# EAGLE board bq25504v2 (EAGLE 7.3.0)
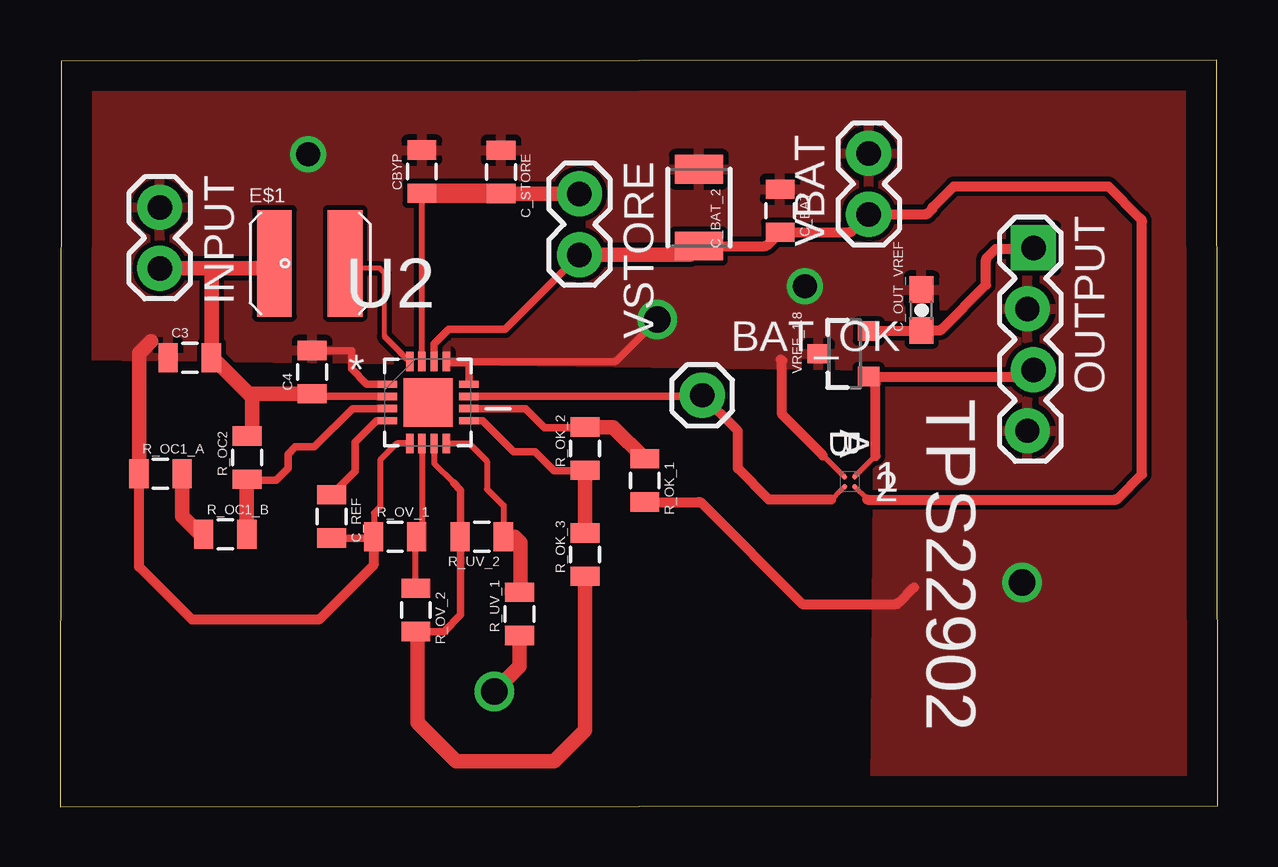
[diagram p0: board, top side]
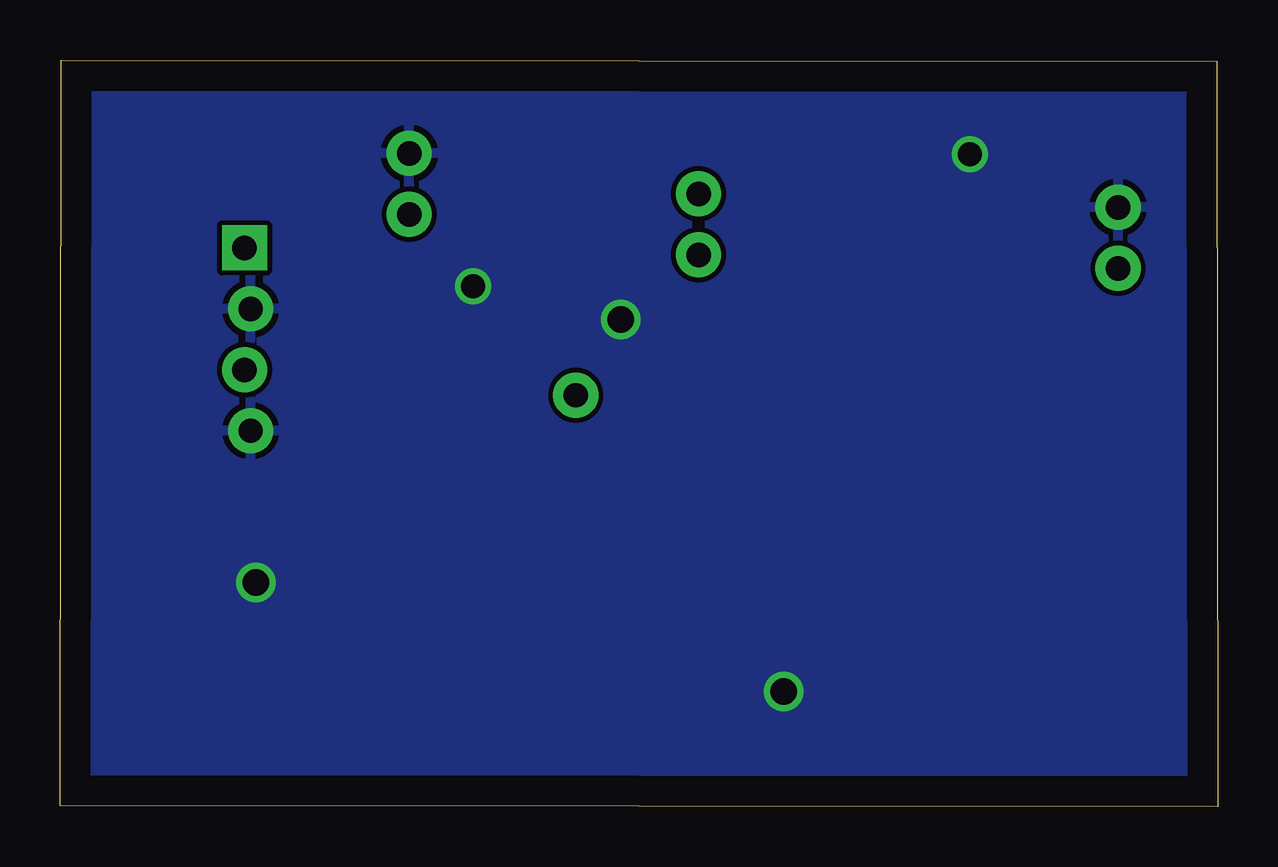
[diagram p1: board, bottom side, seen from below]

Size 48.27 x 31.12 mm. Coordinates in mm from the lower left corner, seen from the top.
Outline: 0,0 48.27,0.05 48.22,31.12 0.05,31.07 0,0
Copper layers (1*16): Top 0.035mm / dielectric 1.5mm / Bottom 0.035mm
Design rules "default *": minimum track width 8mil, minimum drill 24mil, track to track 8mil, track to pad 8mil, pad to pad 8mil, via to via 8mil, smd to smd 8mil, copper to edge 50mil, drill to drill 8mil, minimum pad ring 10mil, minimum via ring 8mil, stop-mask expansion 4mil, vias tented up to drill 0mil, thermal gap 10mil

## Footprints (pad centres in the part's own frame; a part is rotated, then mirrored left to right if it is on the bottom)
1X01 = drill 1.016 pad 1.88: 1 0,0
0805 = smd 0.8 x 1.2: 1 -0.9,0; 2 0.9,0
1210 = smd 1.2 x 2: 1 -1.6,0; 2 1.6,0
0603-CAP = smd 1.1 x 1: 1 -0.85,0; 2 0.85,0
LPS4018 = smd 1.448 x 4.445: A -1.482,0; B 1.469,0
1X02 = drill 1.016 pad 1.88: 1 0,0; 2 2.54,0
1X04_LOCK = drill 1.016 pad 1.88 square: 1 0,0.127 | drill 1.016 pad 1.88: 2 2.54,-0.127; 3 5.08,0.127; 4 7.62,-0.127
BGA4C40P2X2_76X76X63 = smd 0.203 x 0.203: A1 -0.203,0.203; A2 0.203,0.203; B1 -0.203,-0.203; B2 0.203,-0.203
QFN50P350X350X100-17N = smd 0.813 x 0.305: 1 -1.702,0.762; 2 -1.702,0.254; 3 -1.702,-0.254; 4 -1.702,-0.762; 9 1.702,-0.762; 10 1.702,-0.254; 11 1.702,0.254; 12 1.702,0.762 | smd 0.305 x 0.813: 5 -0.762,-1.702; 6 -0.254,-1.702; 7 0.254,-1.702; 8 0.762,-1.702; 13 0.762,1.702; 14 0.254,1.702; 15 -0.254,1.702; 16 -0.762,1.702 | smd 2.032 x 2.032: 17 0,0
SOT23-3 = smd 0.8 x 0.9: 1 -0.95,-1; 2 0.95,-1; 3 0,1.1

## Placement (x,y rotation side)
BAT_OK  M01PTH  [1X01]  26.77,17.15 0 top
C3  4.7uF  [0805]  5.41,18.72 0 top
C4  0.1uF  [0805]  10.51,18.12 90 top
C_BAT  100 uF  [0805]  30.02,24.84 270 top
C_BAT_2  [1210]  26.63,24.97 270 top
C_OUT_VREF  0.1 uF  [0603-CAP]  35.91,20.7 90 top
C_REF  0.01 uF  [0805]  11.32,12.1 270 top
C_STORE  4.7uF  [0805]  18.39,26.46 270 top
CBYP  0.1 uF  [0805]  15.09,26.47 90 top
E$1  [LPS4018]  10.42,22.65 0 top
INPUT  M02PTH  [1X02]  4.16,24.98 270 top
OUTPUT  [1X04_LOCK]  40.45,23.29 270 top
R_OC1_A  10 M  [0805]  4.19,13.89 0 top
R_OC1_B  5.6 M  [0805]  6.89,11.35 0 top
R_OC2  4.42 M  [0805]  7.8,14.56 90 top
R_OK_1  4.42  [0805]  24.38,13.6 270 top
R_OK_2  4.22 M  [0805]  21.89,14.93 90 top
R_OK_3  1.43 M  [0805]  21.89,10.51 90 top
R_OV_1  5.90 M  [0805]  13.97,11.25 0 top
R_OV_2  4.02 M  [0805]  14.83,8.21 270 top
R_UV_1  5.60 M  [0805]  19.15,8.04 90 top
R_UV_2  4.42 M  [0805]  17.58,11.25 180 top
TPS22902  INA216A1YFFR  [BGA4C40P2X2_76X76X63]  32.92,13.55 270 top
U2  BQ24600RVAT  [QFN50P350X350X100-17N]  15.34,16.85 0 top
VBAT  [1X02]  33.71,24.69 90 top
VREF_1.8  [SOT23-3]  32.71,18.88 90 top
VSTORE  [1X02]  21.65,25.54 270 top

## Library data of the parts
BAT_OK C_BAT C_REF CBYP VBAT VREF_1.8 VSTORE = SparkFun
C3 C4 C_STORE = SparkFun-Capacitors; PROD_ID: CAP-11625
C_BAT_2 = SparkFun-Capacitors
C_OUT_VREF = SparkFun-Capacitors; PROD_ID: CAP-09137
E$1 = 3DRobotics_Master_Library
INPUT OUTPUT = SparkFun-Connectors
R_OC1_A R_OC1_B R_OC2 R_OK_1-R_OK_3 R_OV_1 R_OV_2 R_UV_1 R_UV_2 = SparkFun-Resistors
TPS22902 = Texas Instruments_By_element14_Batch_1; MPN: INA216A1YFFR; OC_FARNELL: -; OC_NEWARK: 79R8069; PACKAGE: DSBGA-4; SUPPLIER: Texas Instruments
U2 = Texas Instruments_By_element14_Batch_1; MPN: BQ24600RVAT; OC_FARNELL: -; OC_NEWARK: 72R5026; PACKAGE: VQFN-16; SUPPLIER: Texas Instruments

## Nets
9_PIN: R_OK_2.1 R_OK_3.2 U2.9
10_PIN: R_OK_1.1 R_OK_2.2 U2.10
BAT_OK: BAT_OK.1 TPS22902.B2 U2.11
BOOST_OUT: OUTPUT.3 TPS22902.A1 VREF_1.8.1
GND: C3.1 C4.2 C_BAT.1 C_BAT_2.1 C_OUT_VREF.2 C_REF.2 C_STORE.1 CBYP.2 INPUT.1 OUTPUT.2 OUTPUT.4 R_OC1_A.1 R_OK_1.2 R_OV_1.1 R_UV_1.1 TPS22902.B1 U2.1 U2.5 U2.12 U2.13 VBAT.2 VREF_1.8.3
J: U2.16
N$5: C3.2 C4.1 INPUT.2 R_OC2.2 U2.2
N$9: R_OV_1.2 R_OV_2.1 U2.6
N$11: R_OC1_B.2 R_OC2.1 U2.3
N$13: R_UV_1.2 R_UV_2.1 U2.8
N$14: C_REF.1 U2.4
N$15: R_OC1_A.2 R_OC1_B.1
N$16: C_OUT_VREF.1 OUTPUT.1 VREF_1.8.2
N$18: U2.17
V_BAT: C_BAT.2 C_BAT_2.2 TPS22902.A2 U2.14 VBAT.1 VSTORE.2
V_STORE: C_STORE.2 CBYP.1 U2.15 VSTORE.1
WIRE: R_OK_3.1 R_OV_2.2 R_UV_2.2 U2.7

## Tracks (layer width: path | path; a pad name or v marks a point on that pad's centre or on a via)
9_PIN
  Top 0.305: U2.9 17.61,16.09 18.9,14.8 19.8,14.8 20.6,14 21.86,14 R_OK_2.1
  Top 0.61: R_OK_2.1 R_OK_3.2
10_PIN
  Top 0.305: U2.10 19.4,16.6 20.2,15.8 21.86,15.8 R_OK_2.2
  Top 0.61: R_OK_2.2 23.05,15.83 R_OK_1.1
BAT_OK
  Top 0.203: TPS22902.B2 32.56,13.19 32.53,13.19 32.15,12.8
  Top 0.305: U2.11 26.72,17.1 BAT_OK.1
  Top 0.406: 32.15,12.8 29.55,12.8 28.25,14.1 28.25,15.67 BAT_OK.1
BOOST_OUT
  Top 0.203: TPS22902.A1 33.99,14.62
  Top 0.406: OUTPUT.3 40.36,17.99 arc-45 40.21,17.93 VREF_1.8.1 33.99,17.65 33.99,14.62
GND  (via drill 1, 1.1)
  Top 0.203: TPS22902.B1 32.7,13.75 31.8,14.65
  Top 0.254: U2.5 14.03,15.15 13.35,14.46 13.35,12.51 13.08,12.25 13.08,11.27 R_OV_1.1
  Top 0.305: C_REF.2 13.02,11.2 R_OV_1.1 | U2.12 17.04,18.46 17,18.5 16.15,18.5 U2.13 23.07,18.55 arc45 23.21,18.61 v24.9,20.3 | U2.1 12.79,17.61 12.15,18.25 12.15,19 10.5,19
  Top 0.406: R_OV_1.1 13.07,10.07 10.8,7.8 5.5,7.8 3.3,10 R_OC1_A.1 | 31.8,14.65 30.1,16.35 30.1,18.6 30.05,18.65 | R_OK_1.2 26.62,12.7 arc-45 26.76,12.64 30.95,8.45 34.82,8.45 arc45 34.96,8.51 35.6,9.15
  Top 0.61: R_OC1_A.1 3.29,18.89 3.8,19.4 | R_UV_1.1 19.15,5.85 v18.1,4.8
  other vias: 31.05,21.7 10.35,27.2 40.1,9.35
  pour Top: -0.69,31.42 48.25,31.17 48.35,0.48 33.98,0.73 34.13,18.37 -0.59,18.83
  pour Bottom: -0.79,31.35 48.22,31.25 48.27,0.39 -0.6,0.56
J
  Top 0.203: 13.53,19.6 13.53,22.24 13.33,22.44 12.27,22.44
  Top 0.254: 13.53,19.6 U2.16
N$5
  Top 0.254: 10.51,17.1 C4.1
  Top 0.305: U2.2 10.63,17.1 C4.1
  Top 0.61: C4.1 8,17.22 | 8,17.22 7.86,17.22 6.36,18.72 C3.2 6.31,22.25 6.5,22.44 | R_OC2.2 8,15.46 8,17.22 | INPUT.2 6.5,22.44 | 6.5,22.44 8.56,22.44
N$9
  Top 0.254: U2.6 15.09,11.47 R_OV_1.2 14.83,11.22 R_OV_2.1
N$11
  Top 0.305: U2.3 12.2,16.6 10.6,15 9.8,15 9.5,14.7 9.5,14.1 9,13.6 7.86,13.6 R_OC2.1
  Top 0.61: R_OC2.1 7.79,13.66 R_OC1_B.2
N$13
  Top 0.254: U2.8 17.05,15.15 17.8,14.4 17.8,13.24 18.49,12.55 18.49,11.26 R_UV_2.1
  Top 0.61: R_UV_2.1 18.95,11.25 19.2,11 19.2,8.99 R_UV_1.2
N$14
  Top 0.305: U2.4 13.19,16.09 12.3,15.2 12.3,13.98 C_REF.1
N$15
  Top 0.61: R_OC1_B.1 5.85,11.35 5.1,12.1 R_OC1_A.2
N$16
  Top 0.406: VREF_1.8.2 35.86,19.83 arc45 C_OUT_VREF.1 36.62,19.85 arc45 36.76,19.91 38.6,21.75 38.6,22.77 arc-45 38.66,22.91 39,23.25 40.48,23.25 arc45 OUTPUT.1
V_BAT
  Top 0.203: 33.65,12.8 33.65,12.82 TPS22902.A2
  Top 0.305: U2.14 15.59,19.29 16.2,19.9 18.55,19.9 VSTORE.2
  Top 0.406: C_BAT_2.2 29.37,23.37 arc45 29.51,23.43 C_BAT.2 32.88,23.94 arc45 33.02,24 VBAT.1 36.06,24.69 arc45 36.2,24.75 36.35,24.9 arc-45 36.38,24.98 37.25,25.85 43.7,25.85 45.04,24.51 arc-45 45.1,24.37 45.1,13.85 44.11,12.86 arc-45 43.97,12.8 33.65,12.8
  Top 0.61: VSTORE.2 26.26,23 C_BAT_2.2
V_STORE
  Top 0.254: U2.15 CBYP.1 | CBYP.1
  Top 0.61: C_STORE.2 21.63,25.56 VSTORE.1
  Top 0.813: CBYP.1 18.37,25.57 C_STORE.2
WIRE
  Top 0.254: U2.7 15.59,14.31 16.4,13.5
  Top 0.305: R_OV_2.2 16.01,7.31 16.7,8 16.7,11.23 R_UV_2.2 16.7,11.27 16.7,13.2 16.4,13.5
  Top 0.61: R_OK_3.1 21.89,3.19 20.6,1.9 16.5,1.9 14.9,3.5 14.9,7.24 R_OV_2.2